# EAGLE board 8bitPig-PigstyGates-Panel (EAGLE 9.2.2)
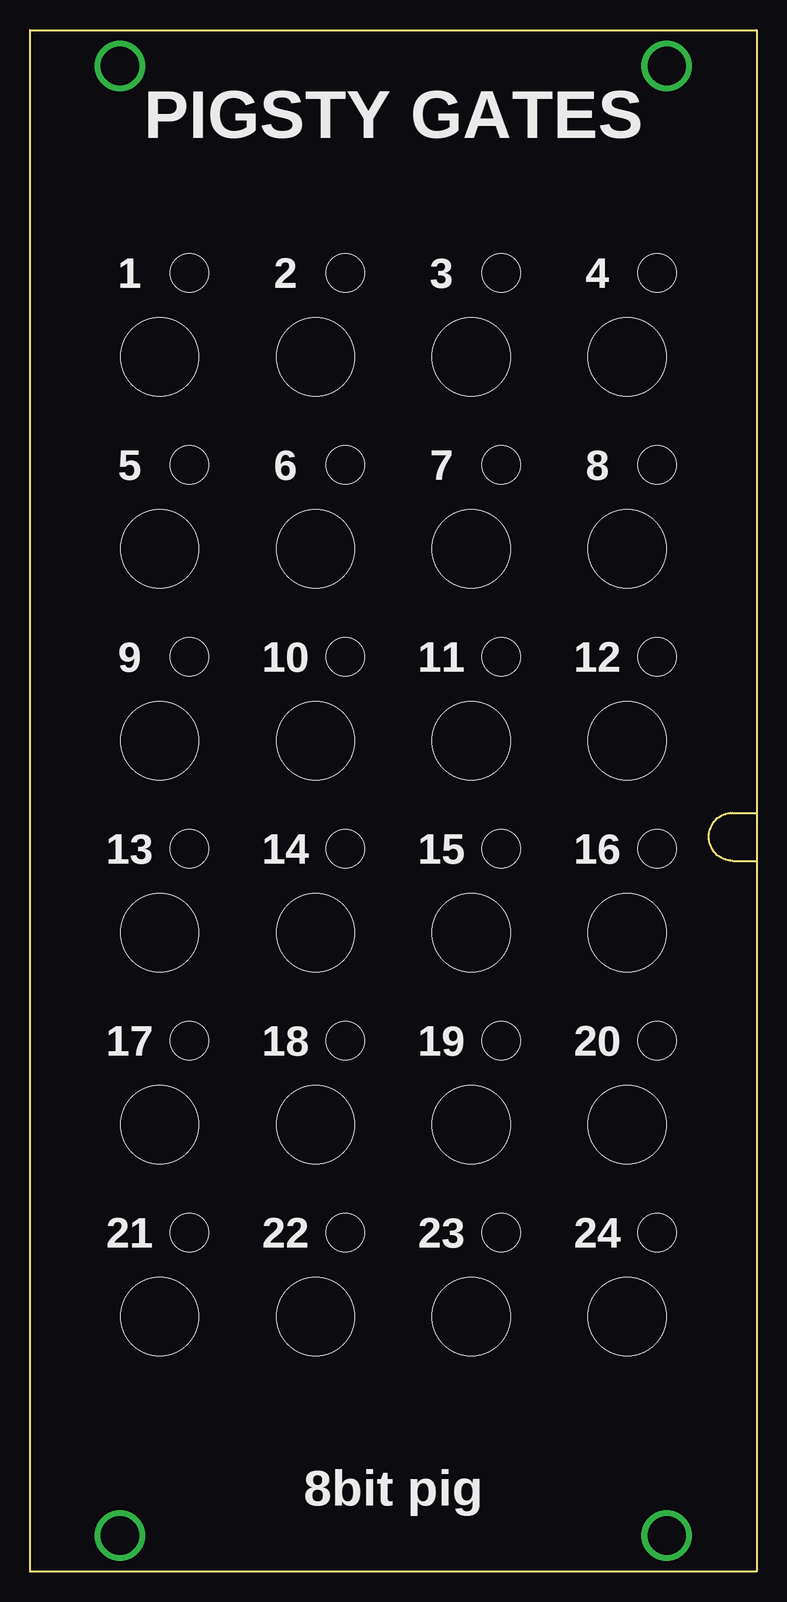
[diagram p0: board, top side]
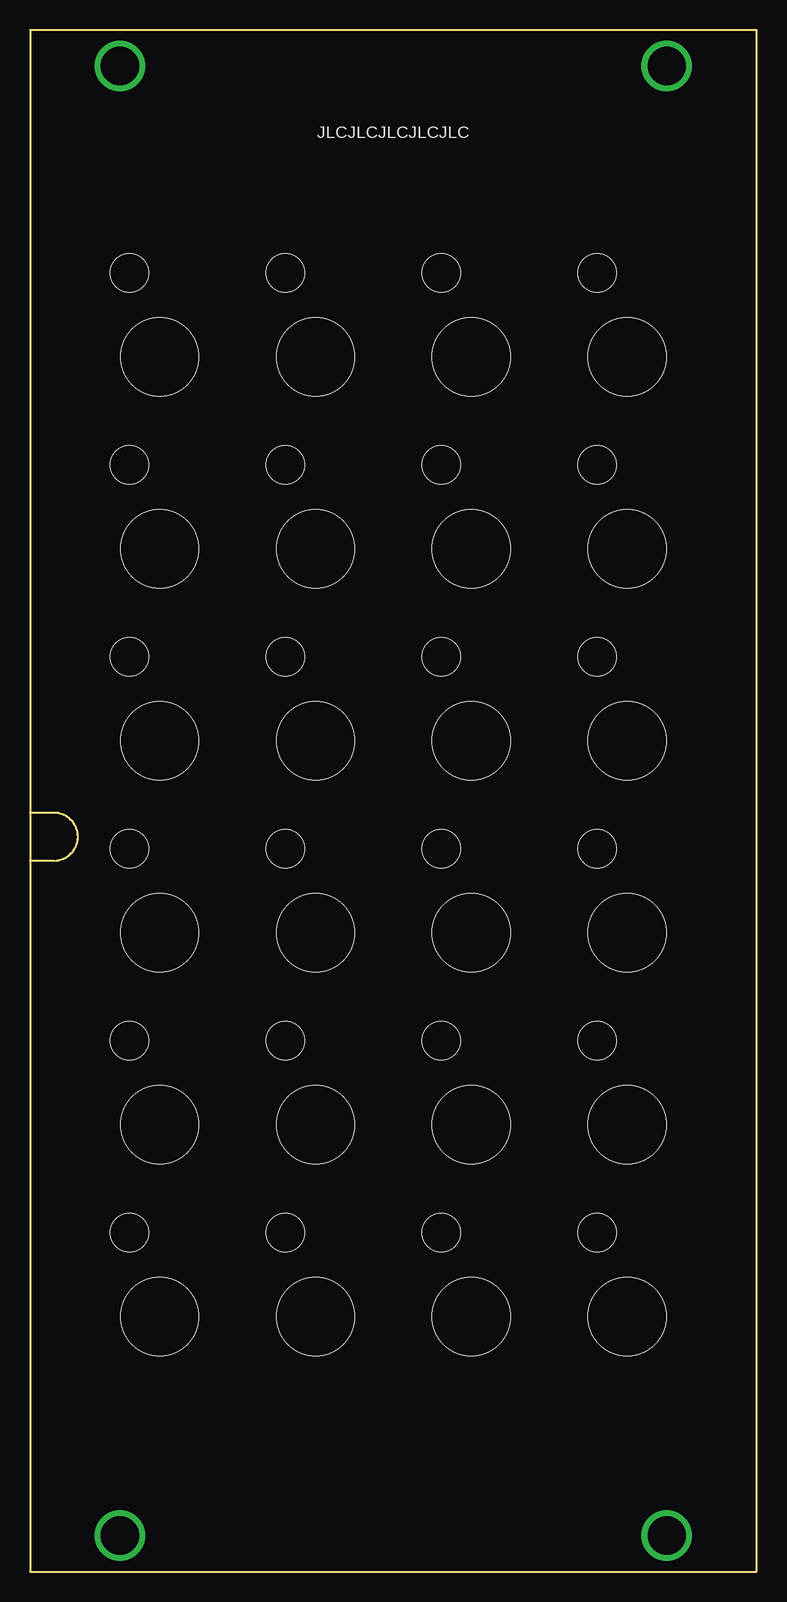
[diagram p1: board, bottom side, seen from below]

Size 60.6 x 128.5 mm. Coordinates in mm from the lower left corner, seen from the top.
Outline: 0,0 0,128.5 60.6,128.5 60.6,0 0,0
Copper layers (1*16): Top 0.035mm / dielectric 1.5mm / Bottom 0.035mm
Design rules "default": minimum track width 6mil, minimum drill 0.35mm, track to track 6mil, track to pad 6mil, pad to pad 6mil, via to via 6mil, smd to smd 6mil, copper to edge 40mil, drill to drill 6mil, minimum pad ring 10mil, minimum via ring 8mil, stop-mask expansion 4mil, vias tented up to drill 0mil, thermal gap 10mil
Holes 6.5 mm at 10.8,21.25 23.8,21.25 36.8,21.25 49.8,21.25 10.8,37.25 23.8,37.25 36.8,37.25 49.8,37.25 10.8,53.25 23.8,53.25 36.8,53.25 49.8,53.25 10.8,69.25 23.8,69.25 36.8,69.25 49.8,69.25 10.8,85.25 23.8,85.25 36.8,85.25 49.8,85.25 10.8,101.25 23.8,101.25 36.8,101.25 49.8,101.25
Holes 3.2 mm at 13.3,28.25 26.3,28.25 39.3,28.25 52.3,28.25 13.3,44.25 26.3,44.25 39.3,44.25 52.3,44.25 13.3,60.25 26.3,60.25 39.3,60.25 52.3,60.25 13.3,76.25 26.3,76.25 39.3,76.25 52.3,76.25 13.3,92.25 26.3,92.25 39.3,92.25 52.3,92.25 13.3,108.25 26.3,108.25 39.3,108.25 52.3,108.25

## Placement (x,y rotation side)
E$1  [PANEL_CABLE_CUTOUT]  60.6,61.25 180 top

## Library data of the parts
E$1 = SchnitzelsComponents

## Tracks (layer width: path | path; a pad name or v marks a point on that pad's centre or on a via)
S$1  (via drill 3.2)
  other vias: 7.5,3
S$2  (via drill 3.2)
  other vias: 7.5,125.5
S$3  (via drill 3.2)
  other vias: 53.1,125.5
S$4  (via drill 3.2)
  other vias: 53.1,3
S$5
  Top 0.152: 10,20 11,20
S$6
  Bottom 0.152: 10,23 11,23

## Text on the board
tPlace: PIGSTY GATES | 1 | 2 | 3 | 4 | 5 | 6 | 7 | 8 | 9 | 10 | 11 | 12 | 13 | 14 | 15 | 16 | 17 | 18 | 19 | 20 | 21 | 22 | 23 | 24 | 8bit pig
bPlace: JLCJLCJLCJLCJLC